# EAGLE board BSPD3_1 (EAGLE 6.5.1)
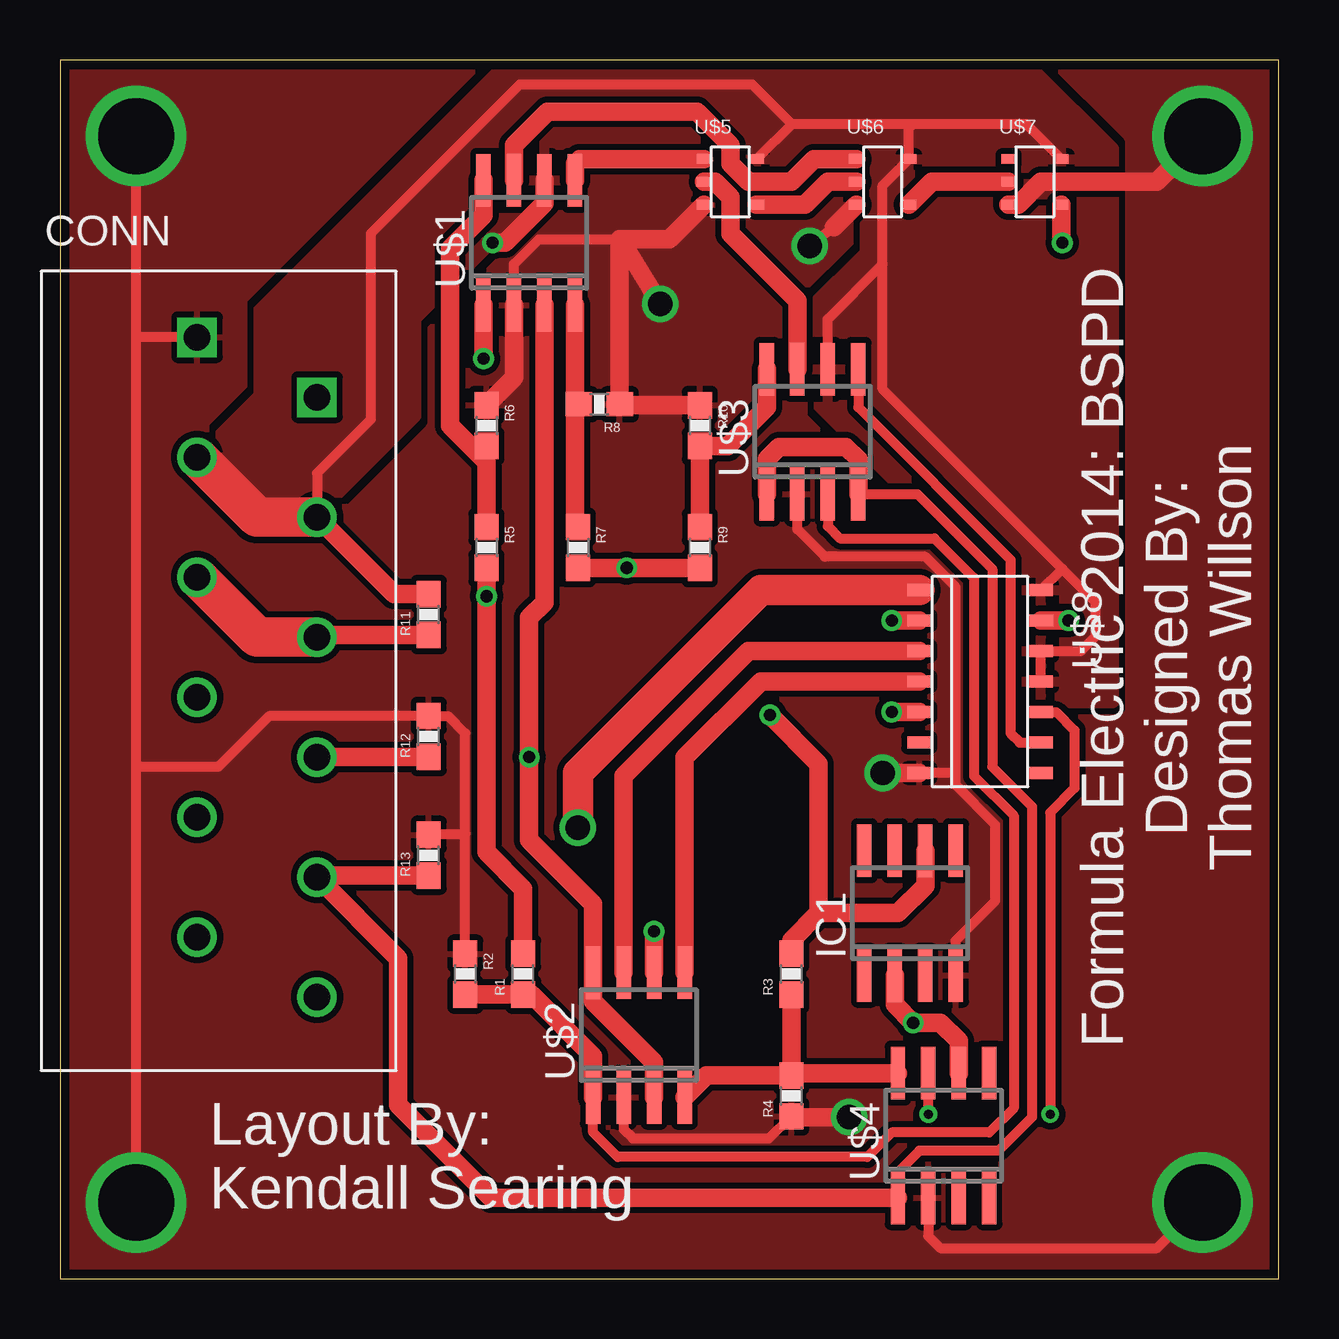
[diagram p0: board, top side]
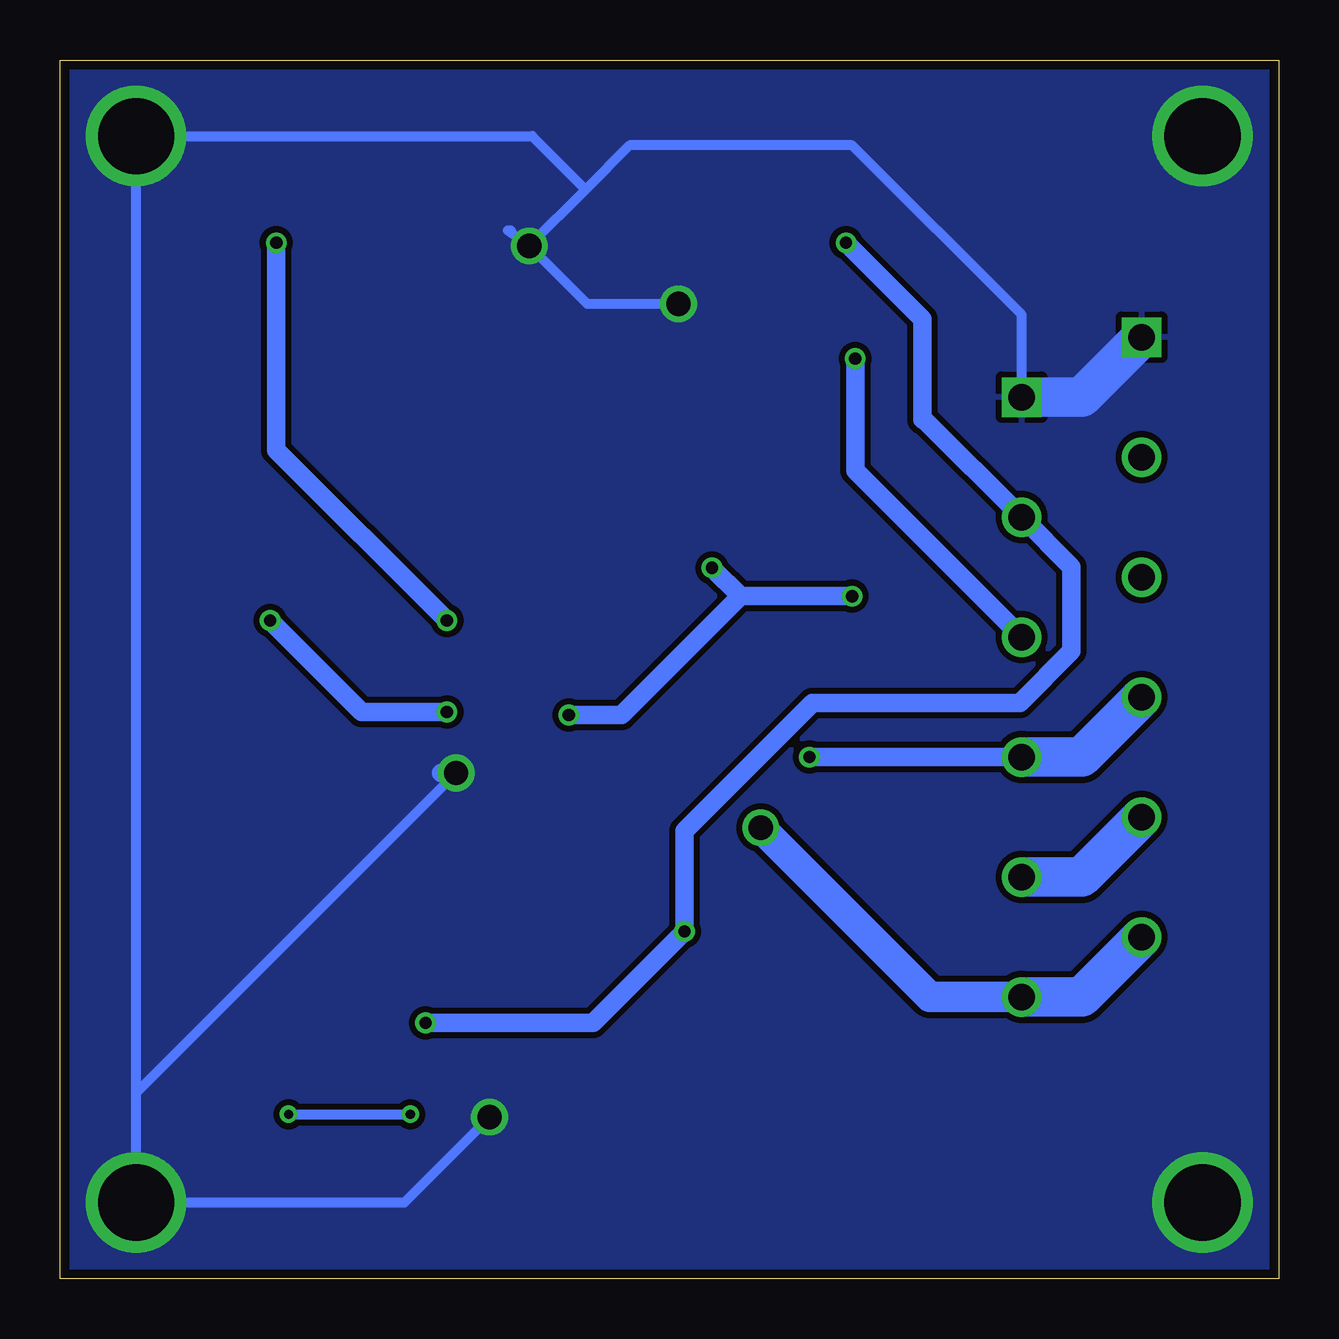
[diagram p1: board, bottom side, seen from below]

Size 50.8 x 50.8 mm. Coordinates in mm from the lower left corner, seen from the top.
Outline: 0,0 50.8,0 50.8,50.8 0,50.8 0,0
Copper layers (1*16): Top 0.0356mm / dielectric 1.5011mm / Bottom 0.0356mm
Design rules "OshPark DRC": minimum track width 6mil, minimum drill 13mil, track to track 6mil, track to pad 6mil, pad to pad 6mil, via to via 6mil, smd to smd 6mil, copper to edge 15mil, drill to drill 6mil, minimum pad ring 7mil, minimum via ring 7mil, stop-mask expansion 3mil, vias tented up to drill 0mil, thermal gap 10mil

## Footprints (pad centres in the part's own frame; a part is rotated, then mirrored left to right if it is on the bottom)
CONNECTOR_6 = drill 1.1 square: 1 0,0; 2 2.5,5 | drill 1.1: 3 5,0; 4 7.5,5; 5 10,0; 6 12.5,5; 7 15,0; 8 17.5,5; 9 20,0; 10 22.5,5; 11 25,0; 12 27.5,5
SOIC8 = smd 0.6 x 2.2: 1 -1.905,-2.6; 2 -0.635,-2.6; 3 0.635,-2.6; 4 1.905,-2.6; 5 1.905,2.6; 6 0.635,2.6; 7 -0.635,2.6; 8 -1.905,2.6
0603-RES = smd 1.1 x 1: 1 -0.85,0; 2 0.85,0
SSOP5-P-0.95 = smd 0.6 x 0.4: P$1 -1.1,0.95; P$2 -1.1,0; P$3 -1.1,-0.95; P$4 1.1,-0.95; P$5 1.1,0.95
NXP_14_SOIC = smd 0.49 x 1: P$1 -3.81,-2.54; P$2 -2.54,-2.54; P$3 -1.27,-2.54; P$4 0,-2.54; P$5 1.27,-2.54; P$6 2.54,-2.54; P$7 3.81,-2.54; P$8 3.81,2.54; P$9 2.54,2.54; P$10 1.27,2.54; P$11 0,2.54; P$12 -1.27,2.54; P$13 -2.54,2.54; P$14 -3.81,2.54

## Placement (x,y rotation side)
CONN  CONN_6  [CONNECTOR_6]  5.71,39.24 270 top
IC1  LT1236S-5  [SOIC8]  35.43,15.24 0 top
R1  1k  [0603-RES]  19.3,12.7 90 top
R2  9.1k  [0603-RES]  16.89,12.7 270 top
R3  9.1k  [0603-RES]  30.48,12.7 90 top
R4  1k  [0603-RES]  30.48,7.62 90 top
R5  3.3k  [0603-RES]  17.78,30.48 270 top
R6  4.7k  [0603-RES]  17.78,35.56 270 top
R7  8.2k  [0603-RES]  21.59,30.48 270 top
R8  2.2k  [0603-RES]  22.48,36.45 180 top
R9  8.87k  [0603-RES]  26.67,30.48 270 top
R10  1.8k  [0603-RES]  26.67,35.56 270 top
R11  10k  [0603-RES]  15.37,27.69 90 top
R12  10k  [0603-RES]  15.37,22.61 90 top
R13  10k  [0603-RES]  15.37,17.65 90 top
U$1  LT1018  [SOIC8]  19.56,43.18 0 top
U$2  LT1018  [SOIC8]  24.13,10.16 0 top
U$3  LT1018  [SOIC8]  31.37,35.31 0 top
U$4  LT1018  [SOIC8]  36.83,5.97 0 top
U$5  TC4S71FT5LFT-OR_GATE  [SSOP5-P-0.95]  27.94,45.72 0 top
U$6  TC4S81FT5LFT-AND_GATE  [SSOP5-P-0.95]  34.29,45.72 0 top
U$7  TC4S69F(TE85L,F)  [SSOP5-P-0.95]  40.64,45.72 0 top
U$8  HEF4082BT,653  [NXP_14_SOIC]  38.35,24.89 270 top

## Library data of the parts
CONN U$5-U$8 = formula electric
IC1 = linear-technology; OC_FARNELL: unknown; OC_NEWARK: unknown
R1-R13 = SparkFun-Resistors
U$1-U$4 = linear-technology

## Nets
1.06V: R7.1 R8.2 U$1.4
2.95V: R5.1 R6.2 U$1.8
4.5V: R1.1 R2.2 U$2.1 U$3.3
12V: CONN.3 CONN.4 IC1.2 R11.2 U$1.6 U$2.6 U$3.6 U$4.6 U$5.P$5 U$6.P$5 U$7.P$5 U$8.P$11 U$8.P$12 U$8.P$14
.5V: R3.1 R4.2 U$2.4 U$4.8
.831V: R9.1 R10.2 U$3.8
ALL_OK: CONN.11 CONN.12 U$8.P$1
BF: CONN.7 CONN.8 R12.1 U$1.3 U$2.3 U$2.8
BR: CONN.9 CONN.10 R13.1 U$3.1 U$3.4 U$4.1
CURRENT: CONN.5 CONN.6 R11.1 U$1.1
GND: CONN.1 CONN.2 IC1.4 R2.1 R4.1 R6.1 R8.1 R10.1 R12.2 R13.2 U$1.2 U$2.2 U$3.2 U$4.2 U$5.P$3 U$6.P$3 U$7.P$3 U$8.P$7
N$1: IC1.6 R1.2 R3.2 R5.2 R7.2 R9.2
N$2: U$1.5 U$5.P$1
N$3: U$3.7 U$5.P$2
N$4: U$5.P$4 U$6.P$2
N$5: U$1.7 U$6.P$1
N$6: U$6.P$4 U$7.P$2
N$7: U$7.P$4 U$8.P$2
N$8: U$2.7 U$8.P$3
N$9: U$2.5 U$8.P$4
N$10: U$8.P$5 U$8.P$13
N$11: U$3.5 U$8.P$9
N$12: U$4.7 U$8.P$10

## Tracks (layer width: path | path; a pad name or v marks a point on that pad's centre or on a via)
1.06V
  Top 0.762: U$1.4 21.46,36.62 R8.2 21.63,36.36 21.46,36.2 21.46,31.46 R7.1
2.95V
  Top 0.406: 17.78,34.04 R6.2
  Top 0.762: R5.1 17.78,34.04 16.26,35.56 16.26,42.93 17.65,44.32 U$1.8
4.5V
  Top 0.406: U$3.3 32,31.37 32.51,30.86 36.45,30.86 38.1,29.21 38.1,20.95 39.75,19.3 39.75,7.11 38.73,6.1 34.67,6.1 33.66,5.08 23.24,5.08 22.23,6.1 U$2.1 | R1.1 19.65,11.85
  Top 0.762: U$2.1 22.23,9.27 19.65,11.85 | R2.2 R1.1
12V  (via drill 0.51)
  Top 0.406: U$7.P$5 40.28,48.13 35.56,48.13 | 35.56,48.13 30.5,48.13 | 30.5,48.13 U$5.P$5 | 35.56,48.13 35.39,47.96 U$6.P$5 34.29,45.57 34.29,42.29 | U$3.6 32,40.01 34.29,42.29 | U$8.P$11 U$8.P$12 42.55,26.16 43.18,26.8 43.18,28.19 41.78,29.59 | 30.5,48.13 28.85,49.78 19.18,49.78 12.95,43.56 12.95,35.81 10.71,33.58 CONN.4 | 41.78,29.59 34.29,37.08 34.29,42.29 | U$8.P$14 41.78,29.59
  Top 0.762: IC1.2 34.8,11.43 v35.56,10.67 36.7,10.67 37.47,9.91 U$4.6 | U$1.6 20.19,44.83 18.54,43.18 v18.03,43.18 | U$2.6 v24.77,14.48 | R11.2 13.92,28.54 CONN.4
  Top 1.651: CONN.3 8.21,31.74 CONN.4
  Bottom 0.406: 14.86,35.81 14.79,35.81
  Bottom 0.762: v18.03,43.18 14.86,40.01 14.86,35.81 | 14.79,35.81 CONN.4 8.64,29.66 8.64,26.16 10.79,24 19.43,24 24.77,18.67 v24.77,14.48 28.57,10.67 v35.56,10.67
  pour Top (isolate 0.254): 5.71,34.29 8.26,31.75 10.67,31.75 14.86,35.94 14.86,40.01 20.07,45.21 33.4,45.21 33.53,45.09 33.53,42.8 31.24,40.51 31.24,36.7 38.86,29.08 38.86,24.77 39.62,24 43.94,24 43.94,47.12 40.64,50.42 18.29,50.42 8.26,40.39 8.26,36.83
.5V
  Top 0.406: R4.2 30.58,8.57
  Top 0.762: R3.1 R4.2 26.95,8.47 U$2.4 | 30.58,8.57 U$4.8
.831V
  Top 0.762: R9.1 R10.2 27.85,34.71 29.46,36.32 U$3.8
ALL_OK  (via drill 1.02)
  Top 1.27: U$8.P$1 29.21,28.7 21.59,21.08 v21.59,18.8
  Bottom 1.27: v21.59,18.8 14.54,11.74 CONN.12
  Bottom 1.651: CONN.12 8.21,11.74 CONN.11
BF  (via drill 0.51)
  Top 0.406: v19.56,21.74 19.56,21.72 | 10.73,21.76 CONN.8
  Top 0.762: U$1.3 20.19,28.19 19.56,27.56 v19.56,21.74 19.56,18.29 22.23,15.62 U$2.8 22.23,11.56 24.77,9.02 U$2.3 | R12.1 10.73,21.76
  Bottom 0.762: CONN.8 v19.56,21.74
  Bottom 1.651: CONN.8 8.21,21.74 CONN.7
BR
  Top 0.406: U$3.4 35.75,32.71 38.86,29.59 38.86,21.34 40.51,19.68 40.51,6.73 39.12,5.33 35.81,5.33 34.92,4.45 U$4.1 | 10.78,16.8 CONN.10
  Top 0.762: U$4.1 17.97,3.37 14.1,7.24 14.1,13.36 CONN.10 | U$3.4 33.27,34.16 32.77,34.67 29.97,34.67 29.46,34.16 U$3.1 | R13.1 10.78,16.8
  Bottom 1.651: CONN.10 8.21,16.74 CONN.9
CURRENT  (via drill 0.51)
  Top 0.406: 10.81,26.84 CONN.6
  Top 0.762: U$1.1 v17.65,38.35 | R11.1 10.81,26.84
  Top 1.651: CONN.5 8.21,26.74 CONN.6
  Bottom 0.762: v17.65,38.35 17.65,33.68 CONN.6
GND  (via drill 1.02, 3.17)
  Top 0.406: U$1.2 18.92,42.29 19.96,43.33 23.37,43.33 | IC1.4 37.34,14.1 38.99,15.75 38.99,18.92 37.34,20.57 37.34,21.08 | 37.34,21.08 37.34,28.83 36.07,30.1 31.88,30.1 30.73,31.24 U$3.2 | 32.26,43.84 v31.24,43.05 | U$2.2 23.5,6.22 23.88,5.84 29.55,5.84 R4.1 30.52,6.73 | 37.34,21.08 U$8.P$7 | R2.1 16.89,18.54 | 16.89,18.54 16.89,22.73 16.17,23.46 R12.2 8.72,23.46 6.6,21.34 3.17,21.34 | R13.2 15.41,18.54 16.89,18.54 | v3.17,3.17 3.17,21.34 | 3.17,21.34 3.17,39.24 | 3.17,39.24 v3.17,47.62 | CONN.1 3.17,39.24 | U$4.2 36.2,1.78 36.7,1.27 45.72,1.27 v47.62,3.17
  Top 0.762: R6.1 18.92,37.55 U$1.2 | U$5.P$3 25.4,43.33 23.37,43.33 | U$6.P$3 32.26,43.84 | U$7.P$3 39.94,44.77 40.89,45.72 45.72,45.72 v47.62,47.62 | 30.52,6.73 v32.89,6.73 | U$8.P$7 v34.29,21.08 | R10.1 23.37,36.41 R8.1 23.33,43.33 23.37,43.33 | v25.02,40.64 23.37,43.33
  Bottom 0.406: v31.24,43.05 32.13,43.69 32,43.69 | v31.24,43.05 28.83,40.64 v25.02,40.64 | CONN.2 10.71,40.18 17.78,47.24 27.05,47.24 28.89,45.4 | 28.89,45.4 v31.24,43.05 | 28.89,45.4 31.11,47.62 v47.62,47.62 47.62,7.75 | v34.29,21.08 47.62,7.75 | v32.89,6.73 36.45,3.17 v47.62,3.17 47.62,7.75
  Bottom 0.762: v34.29,21.08 34.92,21.08
  Bottom 1.651: CONN.2 8.21,36.74 CONN.1
  pour Top (isolate 0.254, rank 2): 50.8,0 0,0 0,50.8 50.8,50.8
  pour Bottom (isolate 0.254): 0,50.8 50.8,50.8 50.8,0 0,0
N$1  (via drill 0.51)
  Top 0.762: R7.2 v23.62,29.63 R9.2 | R3.2 30.48,14.1 31.62,15.24 | 31.62,15.24 34.92,15.24 36.07,16.38 IC1.6 | R5.2 v17.78,28.45 17.78,17.78 19.3,16.26 R1.2 | 31.62,15.24 31.62,21.46 v29.59,23.5
  Bottom 0.762: v17.78,28.45 22.44,28.45 | 22.44,28.45 v23.62,29.63 | v29.59,23.5 27.39,23.5 22.44,28.45
N$2
  Top 0.406: 21.65,46.67 21.46,46.48
  Top 0.762: U$5.P$1 21.65,46.67 | 21.46,46.48 U$1.5
N$3
  Top 0.762: U$5.P$2 27.3,45.72 27.94,45.09 27.94,43.56 30.73,40.77 U$3.7
N$4
  Top 0.762: U$6.P$2 32,45.72 31.05,44.77 U$5.P$4
N$5
  Top 0.762: U$6.P$1 31.43,46.67 30.48,45.72 28.7,45.72 27.94,46.48 27.94,47.24 26.54,48.64 20.32,48.64 18.92,47.24 U$1.7
N$6
  Top 0.762: U$7.P$2 36.34,45.72 U$6.P$4
N$7  (via drill 0.51)
  Top 0.406: v41.78,43.18 41.74,43.22
  Top 0.762: 41.74,43.22 U$7.P$4 | U$8.P$2 v34.67,27.43
  Bottom 0.762: v41.78,43.18 41.78,34.54 v34.67,27.43
N$8
  Top 0.762: U$8.P$3 28.7,26.16 23.5,20.95 U$2.7
N$9
  Top 0.762: U$8.P$4 29.21,24.89 26.04,21.72 U$2.5
N$10  (via drill 0.51)
  Top 0.762: U$8.P$5 v34.67,23.62 | v42.04,27.43 U$8.P$13
  Bottom 0.762: v34.67,23.62 38.23,23.62 v42.04,27.43
N$11
  Top 0.406: U$3.5 33.27,36.32 39.62,29.97 39.62,22.73 40.01,22.35 U$8.P$9
N$12  (via drill 0.38)
  Top 0.406: U$8.P$10 41.53,23.62 42.29,22.86 42.29,20.45 41.27,19.43 v41.27,6.86 | v36.2,6.86 U$4.7
  Bottom 0.406: v41.27,6.86 v36.2,6.86

## Text on the board
tNames: Formula Electric 2014: BSPD / Designed By: / Thomas Willson | Layout By: / Kendall Searing